# Altium PCB Remote_PCB.PcbDoc
Units mil, origin at the board's own origin, x right, y up, seen from the top; angles counter-clockwise.
Board outline 2375 x 945 mil, 2 copper layers (Top Layer, Bottom Layer); 11 components, 9 nets, 58 pads, 0 vias.
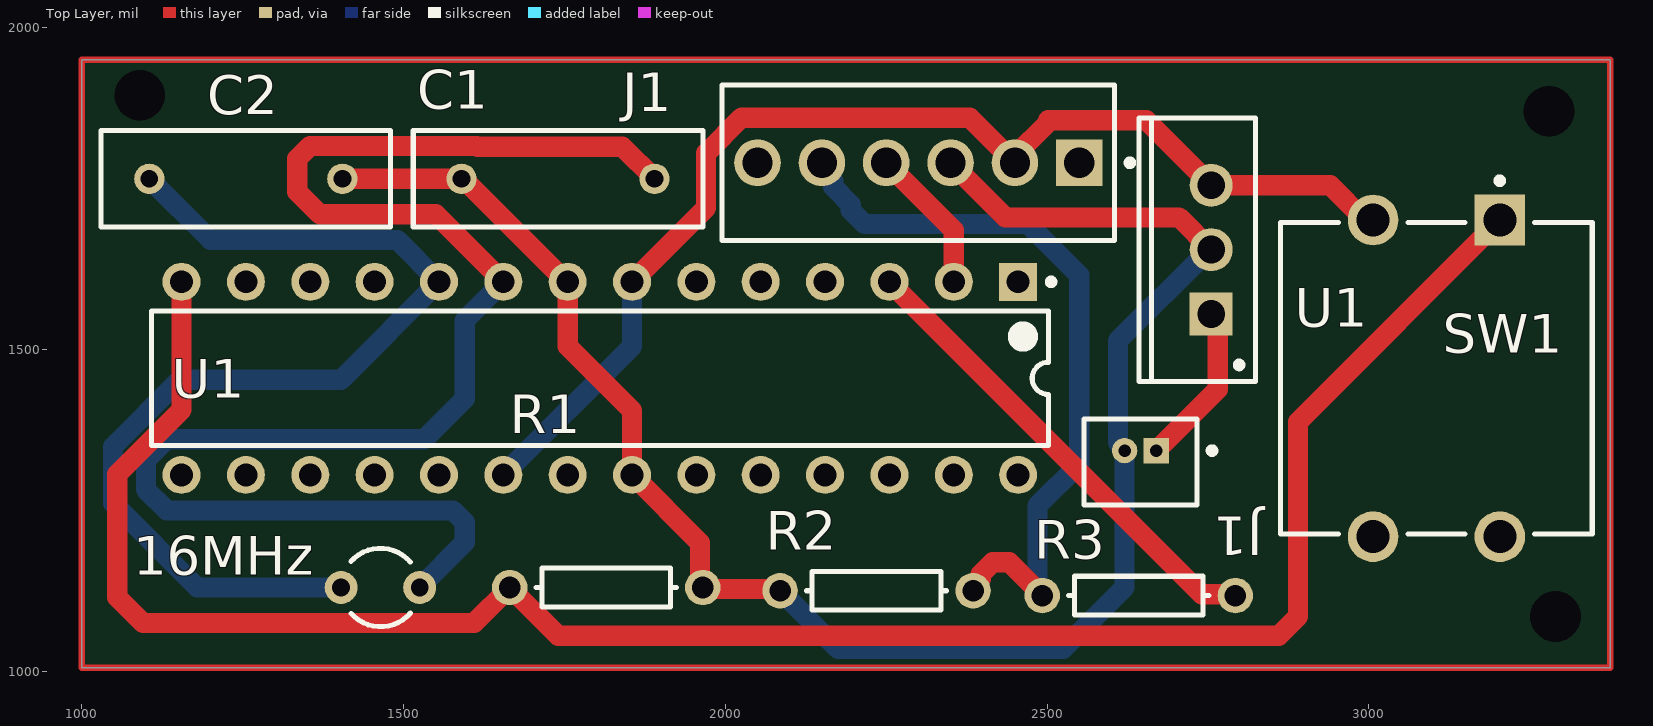
[diagram p0: Top Layer view]
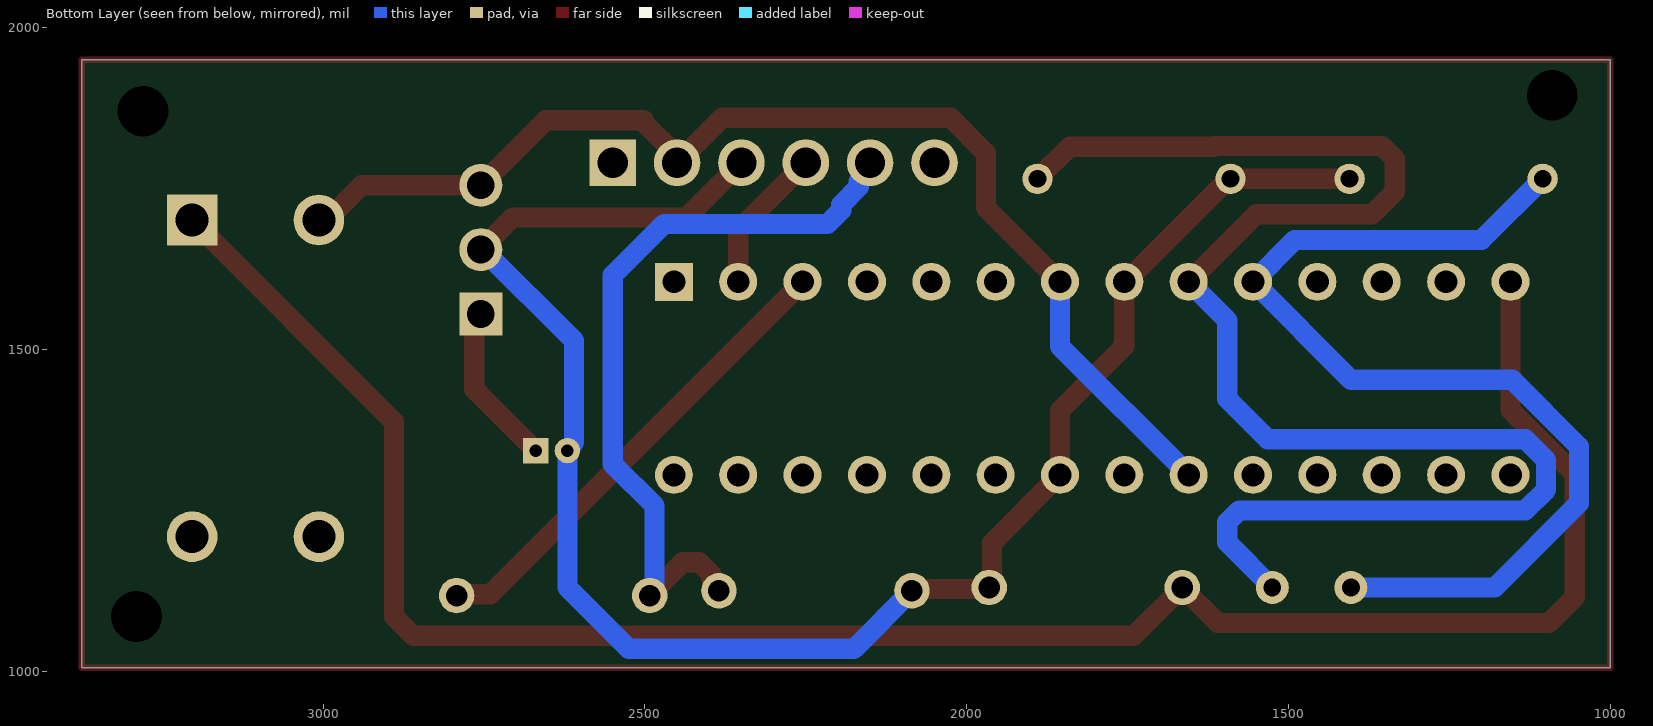
[diagram p1: Bottom Layer view, seen from below]

## Layer stack, top to bottom
Top Solder: solder mask 0.4, Solder Resist, Dk 3.5
Top Layer: signal copper 1.4
Dielectric 1: dielectric 12.6, FR-4, Dk 4.8
Bottom Layer: signal copper 1.4
Bottom Solder: solder mask 0.4, Solder Resist, Dk 3.5

## Board outline
1000,1005 1000,1950 3375,1950 3375,1005

## Design rules (kind name [scope] priority, off if disabled: settings)
Clearance [All] p1: gap=10 ignorepadtopadclearanceinfootprint=TRUE except(0: Arc-Hole Track-Hole SMDPad-Hole THPad-Hole Via-Hole Fill-Hole Poly-Hole Region-Hole Text-Hole; 11.81: SMDPad-SMDPad SMDPad-THPad; 19.68: Arc-Arc Arc-Track Arc-SMDPad Track-Track Track-SMDPad)
MinimumSolderMaskSliver [All] p1: minsoldermaskwidth=8
PolygonConnect [All] p1: connectstyle=Relief reliefconductorwidth=10 reliefentries=4 polygonreliefangle="90 Angle" airgapwidth=10
RoutingVias [All] p1: holewidth=28 width=50 viastyle="Through Hole" minholewidth=28 minwidth=50 maxholewidth=28 maxwidth=50
SilkToSilkClearance [All] p1: silktosilkclearance=9
SilkToSolderMaskClearance [IsPad] p1: minsilkscreentomaskgap=9 clearancetoexposedcopper=TRUE
SolderMaskExpansion [All] p1: expansion=4 istentingtop=FALSE
Width [All] p1: maxlimit=31.5 minlimit=10 preferedwidth=31.5 bottomlayer_minwidth=31.5 minimp=50.000000 maximp=50.000000 favimp=50.000000
27 further rules are at their usual default settings.

## Classes and differential pairs
component class remote_2_22: 16MHz C1 C2 J1 R1 R2 R3 SW1 U1

## Components (designator, comment, footprint, x,y, rotation, side; value= is the part's Value field where it differs from the comment)
16MHz "XTAL" R38 1463.98,1130 r90 top
C1 "Cap" RAD-0.3 1740,1765 r180 top value=220pF
C2 "Cap" RAD-0.3 1255,1765 r0 top value=220pF
J1 "22-27-2061" FP-22-27-2061-MFG 2300,1790 r180 top
J1 "53047-0210" FP-53047-0210-MFG 2645,1325 r0 top
R1 "Res1" AXIAL-0.3 1815,1130 r180 top value=330
R2 "Res1" AXIAL-0.3 2235,1125 r0 top value=2200
R3 "Res1" AXIAL-0.3 2642.5,1117.5 r0 top value=1000
SW1 "FSM103" FP-FSM103-MFG 3105,1455 r90 top
U1 "ATmega328P-PU" 28P3 1805,1455 r270 top
U1 "L7805ACV" TO220 2755,1655 r90 top

## Footprints (in the part's own frame and the unit in brackets; to place one, negate y for a bottom-side part, rotate by r counter-clockwise, add the part's x,y. Pads: shape width x height; smd on the part's side, far side on the other; paste and mask are expansions set on the pad)
28P3 [mm] "28-Pin Plastic Dual In-Line Package (PDIP)"
  rect 1.5x1.5 hole 0.9: 1(-3.81,16.51)
  round 1.5 hole 0.9: 2(-3.81,13.97) 3(-3.81,11.43) 4(-3.81,8.89) 5(-3.81,6.35) 6(-3.81,3.81) 7(-3.81,1.27) 8(-3.81,-1.27) 9(-3.81,-3.81) 10(-3.81,-6.35) 11(-3.81,-8.89) 12(-3.81,-11.43) 13(-3.81,-13.97) 14(-3.81,-16.51) 15(3.81,-16.51) 16(3.81,-13.97) 17(3.81,-11.43) 18(3.81,-8.89) 19(3.81,-6.35) 20(3.81,-3.81) 21(3.81,-1.27) 22(3.81,1.27) 23(3.81,3.81) 24(3.81,6.35) 25(3.81,8.89) 26(3.81,11.43) 27(3.81,13.97) 28(3.81,16.51)
  silkscreen extent -3.93,-17.7 2.65,17.94, body extent -3.6,-17.65 3.6,17.65, height 4.58
AXIAL-0.3 [mm] "Axial Device, Thru-Hole; 2 Leads; 0.3 in Pin Spacing"
  round 1.4 hole 0.85: 1(-3.81,0) 2(3.81,0)
  silkscreen extent -2.77,-0.76 2.77,0.76
FP-22-27-2061-MFG [mm]
  rect 1.84x1.84 hole 1.19 paste-1000 mask+0: 1(-6.35,0)
  round 1.84 hole 1.19 paste-1000 mask+0: 2(-3.81,0) 3(-1.27,0) 4(1.27,0) 5(3.81,0) 6(6.35,0)
  silkscreen extent -8.47,-3.08 7.75,3.08, body extent -7.85,-3.18 7.85,3.17, height 0.25
FP-53047-0210-MFG [mm]
  rect 1x1 hole 0.5 paste-1000 mask+0: 1(0.625,0.45)
  round 1 hole 0.5 paste-1000 mask+0: 2(-0.625,0.45)
  silkscreen extent -2.22,-1.7 2.95,1.7, body extent -2.32,-1.8 2.32,1.8, height 0.25
FP-FSM103-MFG [mm]
  rect 2x2 hole 1.3 paste-1000 mask+0: 1(6.25,-2.5)
  round 2 hole 1.3 paste-1000 mask+0: 2(-6.25,-2.5) 3(6.25,2.5) 4(-6.25,2.5)
  silkscreen extent -6.15,-6.15 7.92,6.15, body extent -7.35,-6.25 7.35,6.25, height 0.25
R38 [mm] "Crystal, Thru-Hole; 2 Leads; Body 3.1 x 8.2 mm (Dia.xH)"
  round 1.3 hole 0.7: 1(0,1.55) 2(0,-1.55)
  silkscreen extent -1.55,-1.19 1.55,1.17
RAD-0.3 [mm] "Radial Cap, Thru-Hole; 2 Leads; 0.3 in Pin Spacing"
  round 1.2 hole 0.7: 1(-3.81,0) 2(3.81,0)
  silkscreen extent -5.71,-1.91 5.71,1.91
TO220 [mm] "TO, Thru-Hole, Vertical, Heatsink Mounted; 3 In-Line Leads; Pitch 2.54 mm"
  rect 1.7x1.7 hole 1.1: 1(-2.54,0)
  round 1.7 hole 1.1: 2(0,0) 3(2.54,0)
  silkscreen extent -5.2,-1.75 5.2,2.85, body extent -5.25,-1.8 5.25,2.9, height 19.7

## Part data
16MHz: "Crystal Oscillator", LatestRevisionDate=17-Jul-2002, LatestRevisionNote="Re-released for DXP Platform.", PackageDescription="Crystal, Thru-Hole; 2 Leads; Body 3.1 x 8.2 mm (Dia.xH)", PackageReference=R38, Published=8-Jun-2000, Publisher="Altium Limited"
C1 C2: "Capacitor", LatestRevisionDate=17-Jul-2002, LatestRevisionNote="Re-released for DXP Platform.", PackageDescription="Radial Cap, Thru-Hole; 2 Leads; 0.3 in Pin Spacing", PackageReference=RAD-0.3, Published=8-Jun-2000, Publisher="Altium Limited"
J1: library part CMP-04776-000309-1, "CONN HEADER VERT 6POS 2.54MM", Color=Natural, Contact Resistance=10mR, Current Rating=4A, Flammability Rating="UL94 V-0", Housing Color=White, Max Operating Temperature=75°C, Max Voltage Rating (AC)=250V, Min Operating Temperature=0°C, Package Quantity=10000, Connector Type="Male Pin", Contact Material=Brass, Contact Mating Length=0.295inch, Contact Plating=Tin, Contact Type="Male Pin", Depth=5.8mm, Fastening Type=Friction, Gender=Male, Hole Diameter=1.02mm, Housing Material=Nylon, Lead Pitch=2.54mm, Length=15.24mm, Material=Nylon, Max Current Rating=4A, Mount="Through Hole", Number of Contacts=6, Number of Positions=6, Number of Rows=1, Orientation=Straight, Packaging=Bulk, Pitch=2.54mm, Radiation Hardening=No, REACH SVHC="No SVHC", Series=KK, Termination=Solder, Voltage Rating=250V, Voltage Rating (AC)=250V, Working Voltage=250V
J1: library part CMP-09385-000003-1, "CROSS CONN BRIDGE TERM BLK 2POS", Color=Red, Package Quantity=50, Approvals=EAC, Housing Color=Red, Lead Free="Lead Free", Number of Circuits=2, Number of Contacts=2, Number of Pins=2, Number of Positions=2, Number of Rows=1, Orientation=Straight, Packaging=Bulk, REACH SVHC="No SVHC", Series=CLIPLINE, Weight=0.061377oz
R1 R2 R3: "Resistor", LatestRevisionDate=17-Jul-2002, LatestRevisionNote="Re-released for DXP Platform.", PackageDescription="Axial Device, Thru-Hole; 2 Leads; 0.3 in Pin Spacing", PackageReference=AXIAL-0.3, Published=8-Jun-2000, Publisher="Altium Limited"
SW1: library part CMP-03407-000037-1, "SWITCH TACTILE SPST-NO 0.05A 24V", Actuator Color=Black, Contact Current Rating=50mA, Contact Resistance=100mR, Max Operating Temperature=85°C, Max Voltage Rating (DC)=12V, Min Operating Temperature=-35°C, Operating Force=1.57N, Package Quantity=400, Voltage Rating=24V, Actuator Length=3.4mm, Actuator Material=Polyester, Contact Material=Brass, Contact Plating=Silver, Current Rating=50mA, Depth=14.1mm, Electrical Life=100000Cycles, Illumination Type=Non-Illuminated, Length=12mm, Max Current Rating=50mA, Mechanical Life=100000Cycles, Mount="Through Hole", Orientation=Straight, Packaging="Loose Piece", Radiation Hardening=No, RoHS Compliant=Yes, Series="FSM100 ~ 104", Switch Function=Off-Mom, Switch Travel=0.3mm, Termination="PC Pins", Throw Configuration=SPST, Type=Switch, Voltage Rating (DC)=12V, Width=12mm
U1: library part CMP-0095-00013-2, "8-bit AVR Microcontroller, 32KB Flash, 1KB EEPROM, 2KB SRAM, 28-pin PDIP, Industrial Grade (-40°C to 85°C)", ComponentLink1Description="Manufacturer URL", ComponentLink1URL=http://www.atmel.com/, ComponentLink2Description="ATmega48A/48PA/88A/88PA/168A/168PA/328/328P Datasheet", ComponentLink2URL=http://www.atmel.com/dyn/resources/prod_documents/8271.pdf, ComponentLink3Description="ATmega48A/48PA/88A/88PA/168A/168PA/328/328P Summary", ComponentLink3URL=http://www.atmel.com/dyn/resources/prod_documents/8271S.pdf, DatasheetVersion="revD, May-2011", PackageDescription="28-lead (0.300\"/7.62mm Wide) Plastic Dual Inline Package (PDIP)", PackageReference=28P3, PackageVersion="revB, Sep-2001", RevisionNote="DatasheetVersion updated. URLs added."
U1: library part CMP-0244-00484-1, "Positive Voltage Regulator, 5V, 3-Pin TO-220", ComponentLink1Description="Manufacturer URL", ComponentLink1URL=http://www.st.com, ComponentLink2Description=Datasheet, ComponentLink2URL=http://www.st.com/internet/com/TECHNICAL_RESOURCES/TECHNICAL_LITERATURE/DATASHEET/CD00000444.pdf, ComponentLink3Description="Package Specification", ComponentLink3URL=http://www.st.com/internet/com/TECHNICAL_RESOURCES/TECHNICAL_LITERATURE/PACKAGE_INFORMATION/CD00004649.pdf, DatasheetVersion=16/11/2011, PackageDescription="TO, Thru-Hole, Vertical, Heatsink Mounted; 3 In-Line Leads; Pitch 2.54 mm", PackageReference=TO220, PackageVersion=ver3.0

## Free pads (board coordinates)
  round 60 hole 78.74: 1(1090,1895) 2(3280,1870) 3(3290,1085)

## Nets (pads, with @x,y where several pads share a name; then routed paths per layer and width w, separated by ;. In a path a pad name is that pad's centre, name@x,y a point inside that pad or via, vN(x,y) a via of type N, cw(c..) or ccw(c..) an arc to the next point about the centre after c; other vN are vias at no path point)
Net16MHz_1: 16MHz.1 C2.1 U1.10 | length 1625.6
  Bottom Layer w31.5: C2.1 1200,1670 1490,1670 U1.10 1402.95,1452.95 1152.4,1452.95 1048.54,1349.1 1048.54,1260.9 1179.45,1130 16MHz.1
Net16MHz_2: 16MHz.2 C1.1 U1.9 | length 2447.7
  Top Layer w31.5: U1.9 1550,1710 1370,1710 1335,1745 1335,1796.55 1354.63,1816.18 1613.7,1816.18 1614.88,1815 1840,1815 C1.1
  Bottom Layer w31.5: 16MHz.2 1595,1200 1595,1231.27 1576.55,1249.72 1132.1,1249.72 1099.72,1282.1 1099.72,1327.9 1132.1,1360.28 1532.1,1360.28 1595,1423.17 1595,1545 U1.9
NetC1_2: C1.2 C2.2 J1.2@2620.39,1342.72 J1.3 R1.1 R2.1 U1.2@2755,1655 U1.8 U1.22 | length 2764.4
  Top Layer w31.5: C2.2 C1.2 1592.5,1765 1752.5,1605 U1.8 1755,1505 1855,1405 U1.22 1960.48,1199.52 1960.48,1134.52 R1.1 1967.5,1127.5 2082.5,1127.5 R2.1 ; J1.3 2435,1705 2705,1705 U1.2@2755,1655
  Bottom Layer w31.5: R2.1 2175,1035 2525,1035 2620.39,1130.39 2620.39,1344.85 2610,1355.24 2610,1513.34 2751.66,1655 U1.2@2755,1655
NetJ1_1: J1.1@2669.61,1342.72 U1.1@2755,1555 | length 255.9
  Top Layer w31.5: J1.1@2669.61,1342.72 2765,1438.11 2765,1545 U1.1@2755,1555
NetJ1_2: J1.2@2450,1790 SW1.3 U1.3@2755,1755 U1.7 U1.20 | length 1818.7
  Top Layer w31.5: U1.7 1970,1720 1970,1805 2025,1860 2380,1860 2450,1790 2450,1801.08 2501.48,1852.56 2501.48,1855.91 2654.09,1855.91 2755,1755 2939.85,1755 2993.79,1701.06 SW1.3
  Bottom Layer w31.5: U1.20 1855,1505 U1.7
NetJ1_4: J1.4 U1.2@2355,1605 | length 228.5
  Top Layer w31.5: J1.4 2355,1685 U1.2@2355,1605
NetJ1_5: J1.5 R2.2 R3.1 | length 1178.9
  Top Layer w31.5: R2.2 2385,1131.39 2396.81,1143.2 2396.81,1150.95 2415.26,1169.4 2441.35,1169.4 2492.5,1118.26 R3.1
  Bottom Layer w31.5: J1.5 2150,1778.92 2167.52,1761.4 2167.52,1752.48 2195,1725 2195,1716.08 2216.08,1695 2470,1695 2550,1615 2550,1321.83 2485,1256.83 R3.1@2485,1115 ; R3.1@2486.11,1117.5 R3.1
NetR1_2: R1.2 SW1.1 U1.14 | length 3195.2
  Top Layer w31.5: U1.14 1155,1406.27 1055,1306.27 1055,1115 1095,1075 1610,1075 R1.2 1740,1055 2860,1055 2890,1085 2890,1387.64 SW1.1
NetR3_2: R3.2 U1.3@2255,1605 | length 733
  Top Layer w31.5: U1.3@2255,1605 2740.48,1119.52 2780.48,1119.52 R3.2@2785,1115
pads on no net: J1.1@2550,1790 J1.6 SW1.2 SW1.4 U1.1@2455,1605 U1.4 U1.5 U1.6 U1.11 U1.12 U1.13 U1.15 U1.16 U1.17 U1.18 U1.19 U1.21 U1.23 U1.24 U1.25 U1.26 U1.27 U1.28
copper on no net: | length 6640
  Top Layer w10: 1000,1005 3375,1005 3375,1950 1000,1950 1000,1005